# Altium PCB PCB_DYBoard_FlexiFlex.PcbDoc
Units mm, origin at the board's own origin, x right, y up, seen from the top; angles counter-clockwise.
Board outline 29.5 x 12.5 mm, 2 copper layers (Top Layer, Bottom Layer); 34 components, 15 nets, 76 pads, 20 vias.
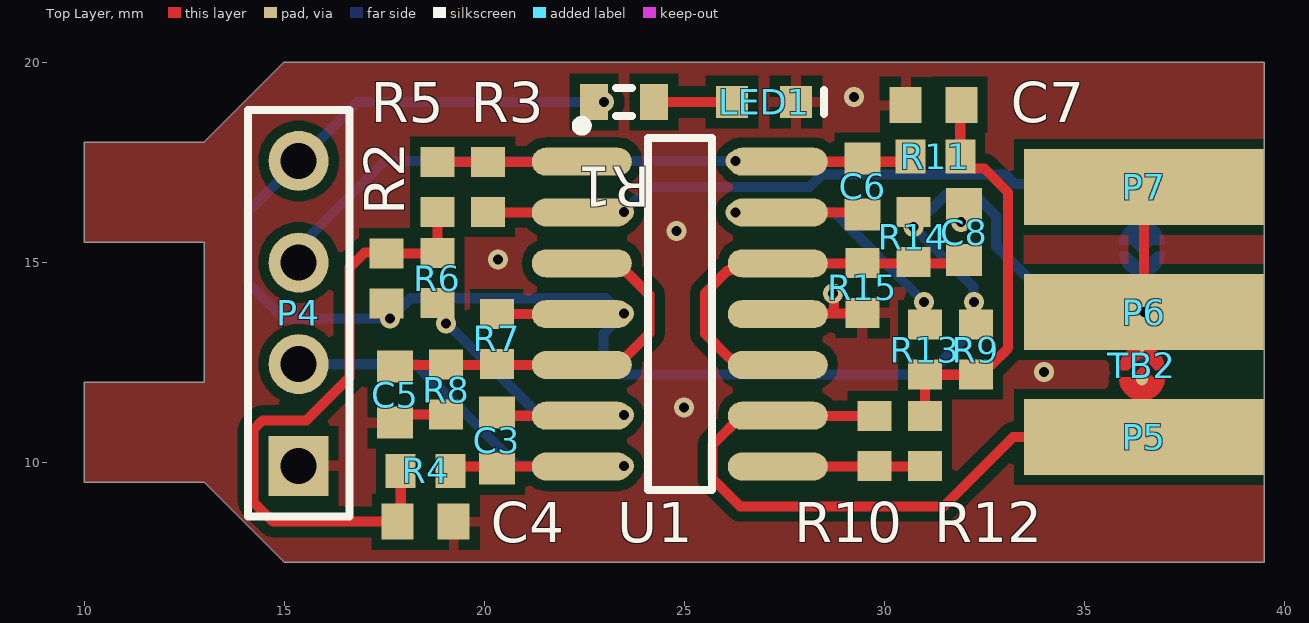
[diagram p0: Top Layer view]
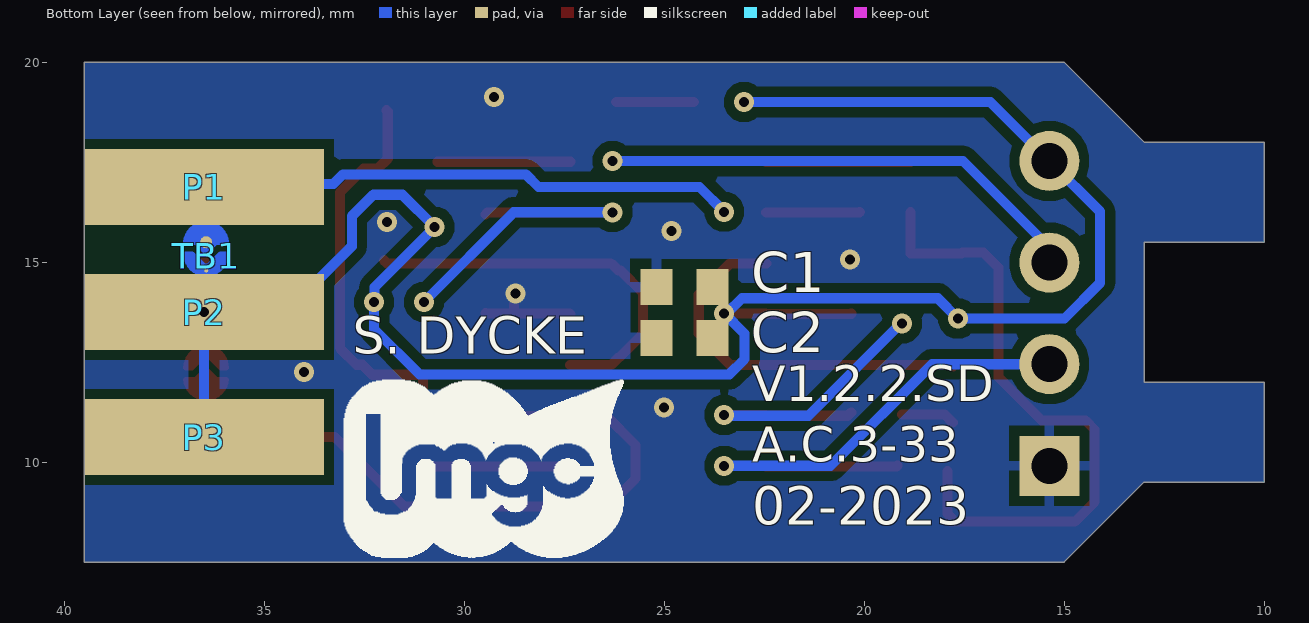
[diagram p1: Bottom Layer view, seen from below]

## Layer stack, top to bottom
Top Solder: solder mask 0.0102, Solder Resist, Dk 3.5
Top Layer: signal copper 0.0356
Dielectric 1: dielectric 0.32, FR-4, Dk 4.8
Bottom Layer: signal copper 0.0356
Bottom Solder: solder mask 0.0102, Solder Resist, Dk 3.5

## Board outline
10,9.5 10,12 13,12 13,15.5 10,15.5 10,18 13,18 15,20 39.5,20 39.5,7.5 15,7.5 13,9.5

## Design rules (kind name [scope] priority, off if disabled: settings)
Clearance [All] p1: gap=0.254 ignorepadtopadclearanceinfootprint=FALSE except(0: Arc-Hole Track-Hole SMDPad-Hole THPad-Hole Via-Hole Fill-Hole Poly-Hole Region-Hole Text-Hole)
ComponentClearance [All] p1: gap=-10 collisioncheckmode=3 verticalgap=2540 showdistances=FALSE
HoleSize [All] p1: absolutevalues=TRUE maxlimit=2.54 minlimit=0.3 maxpercent=80.000 minpercent=20.000
PolygonConnect [All] p1: connectstyle=Relief reliefconductorwidth=0.254 reliefentries=4 polygonreliefangle="90 Angle" airgapwidth=0.254
RoutingVias [All] p1: holewidth=0.711 width=1.27 viastyle="Through Hole" minholewidth=0.711 minwidth=1.27 maxholewidth=0.711 maxwidth=1.27
SolderMaskExpansion [All] p1: expansion=0.102 istentingtop=FALSE
Width [All] p1: maxlimit=0.254 minlimit=0.254 preferedwidth=0.254
28 further rules are at their usual default settings.

## Components (designator, comment, footprint, x,y, rotation, side; value= is the part's Value field where it differs from the comment)
C1 "Cap Semi" 1608[0603] 24.492,14.375 r180 bottom value=0.1µF
C2 "Cap Semi" 1608[0603] 24.492,13.105 r180 bottom value=10µF
C3 "Cap Semi" 1608[0603] 20.32,10.541 r270 top value=0.47µF
C4 "Cap Semi" 1608[0603] 18.542,8.509 r0 top value=10µF
C5 "Cap Semi" 1608[0603] 17.78,11.684 r90 top value=0.47µF
C6 "Cap Semi" 1608[0603] 29.464,16.891 r90 top value=0.47µF
C7 "Cap Semi" 1608[0603] 31.242,18.923 r180 top value=10µF
C8 "Cap Semi" 1608[0603] 32.004,15.748 r270 top value=0.47µF
LED1 "150060BS75000" 0603_A 27,19 r180 top
P1 "solderPad" solderPad#1 36.5,16.875 r0 top
P2 "solderPad" solderPad#1 36.5,13.75 r0 top
P3 "solderPad" solderPad#1 36.5,10.625 r0 top
P4 "Header 4" HDR1X4 15.367,9.906 r90 top
P5 "solderPad" solderPad#2 36.5,10.625 r0 top
P6 "solderPad" solderPad#3 46.994,15.016 r0 top
P7 "solderPad" solderPad#4 36.162,17.152 r0 top
R1 "Res3" J1-0603 23.5,19 r180 top value=1K
R2 "10K" RESC1609X60X30LL10T20 17.565,14.586 r90 top
R3 "470K" RESC1609X60X30LL10T20 20.105,16.872 r270 top
R4 "10K" RESC1609X60X30LL10T20 18.542,9.779 r180 top
R5 "4.7K" RESC1609X60X30LL10T20 18.835,16.872 r90 top
R6 "4.7K" RESC1609X60X30LL10T20 18.835,14.596 r90 top
R7 "100K" RESC1609X60X30LL10T20 20.32,13.081 r270 top
R8 "100K" RESC1609X60X30LL10T20 19.05,11.811 r270 top
R9 "10K" RESC1609X60X30LL10T20 32.297,12.808 r270 top
R10 "470K" RESC1609X60X30LL10T20 29.757,10.522 r90 top
R11 "10K" RESC1609X60X30LL10T20 31.281,17.634 r0 top
R12 "4.7K" RESC1609X60X30LL10T20 31.027,10.522 r270 top
R13 "4.7K" RESC1609X60X30LL10T20 31.027,12.808 r270 top
R14 "100K" RESC1609X60X30LL10T20 30.734,15.621 r270 top
R15 "100K" RESC1609X60X30LL10T20 29.464,14.351 r270 top
TB1 "tin_bridge" tin_bridge#1 36.444,16.092 r0 bottom
TB2 "tin_bridge" tin_bridge#2 36.444,11.467 r0 top
U1 "MCP6004T-E/SL" SOIC-SL14_M 24.894,13.697 r0 top

## Footprints (in the part's own frame and the unit in brackets; to place one, negate y for a bottom-side part, rotate by r counter-clockwise, add the part's x,y. Pads: shape width x height; smd on the part's side, far side on the other; paste and mask are expansions set on the pad)
0603_A [mm] "Chip LED, 2-Leads, Body 1.6x0.8mm, IPC Medium Density"
  rect 0.8x0.8 smd: 1(-0.8,0) 2(0.8,0)
  silkscreen extent -1.5,-0.3 -1.5,0.3, body extent -0.8,-0.4 0.8,0.4, height 0.7
1608[0603] [mm] "Chip Capacitor, Body 1.6x0.8mm, IPC High Density"
  rect 0.8x0.9 smd: 1(-0.7,0) 2(0.7,0)
  body extent -0.87,-0.48 0.87,0.48, height 1.3
HDR1X4 [mm] "Connector; Header; 4 Position"
  rect 1.5x1.5 hole 0.9: 1(0,0)
  round 1.5 hole 0.9: 2(2.54,0) 3(5.08,0) 4(7.62,0)
  silkscreen extent -1.27,-1.27 8.89,1.27
J1-0603 [mm] "Chip Resistor, Body 1.6x0.8mm, IPC High Density"
  rect 0.7x0.9 smd: 1(-0.75,0) 2(0.75,0)
  silkscreen extent -0.2,-0.35 0.2,0.35, body extent -0.85,-0.48 0.85,0.48, height 0.9
RESC1609X60X30LL10T20 [mm] "Chip Resistor, 2-Leads, Body 1.60x0.85mm, IPC High Density"
  rect 0.75x0.85 smd: 1(-0.625,0) 2(0.625,0)
  body extent -0.85,-0.48 0.85,0.48, height 0.6
SOIC-SL14_M [mm] "SOIC, 14-Leads, Body 8.7x3.9mm, Pitch 1.27mm, IPC Low Density"
  oval 2.5x0.7 smd: 1(-2.45,3.81) 2(-2.45,2.54) 3(-2.45,1.27) 4(-2.45,0) 5(-2.45,-1.27) 6(-2.45,-2.54) 7(-2.45,-3.81) 8(2.45,-3.81) 9(2.45,-2.54) 10(2.45,-1.27) 11(2.45,0) 12(2.45,1.27) 13(2.45,2.54) 14(2.45,3.81)
  silkscreen extent -2.57,-4.4 0.8,4.83, body extent -2,-4.38 2,4.38, height 1.75
solderPad#1 [mm]
  rect 6x1.9 smd far side: 20(0,0)
solderPad#2 [mm]
  rect 6x1.9 smd: 20(0,0)
solderPad#3 [mm]
  rect 6x1.9 smd: 20(-10.494,-1.266)
solderPad#4 [mm]
  rect 6x1.9 smd: 20(0.338,-0.277)
tin_bridge#1 [mm]
  round 0.1 smd mask+0: 21(0,1.303)
  round 0.3 smd mask+0: 22(0.005,0.598)
  Top Layer region: -0.509,0.598 -0.503,0.598 -0.249,0.127 0.254,0.127 0.519,0.598 0.259,0.598 0.005,0.852 -0.249,0.598 -0.503,0.598
  Top Layer region: -0.508,0.889 -0.354,0.889 -0.051,1.192 0.056,1.192 0.359,0.889 0.513,0.889 0.508,0.894 0.381,1.143 0.254,1.397 -0.254,1.397 -0.381,1.143
  Top Layer lines w0.127: -0.509,0.598 ccw(c0.005,0.643) 0.519,0.598 ; -0.503,0.598 -0.249,0.598 0.005,0.852 0.259,0.598 0.513,0.598 ; -0.503,0.889 cw(c0.005,0.889) 0,1.397 cw(c0.005,0.889) 0.513,0.889 0.359,0.889 0.056,1.192 0,1.192 -0.051,1.192 -0.354,0.889 -0.503,0.889
tin_bridge#2 [mm]
  round 0.1 smd mask+0: 21(0,1.303)
  round 0.3 smd mask+0: 22(0.005,0.598)
  Top Layer region: -0.509,0.598 -0.503,0.598 -0.249,0.127 0.254,0.127 0.519,0.598 0.259,0.598 0.005,0.852 -0.249,0.598 -0.503,0.598
  Top Layer region: -0.508,0.889 -0.354,0.889 -0.051,1.192 0.056,1.192 0.359,0.889 0.513,0.889 0.508,0.894 0.381,1.143 0.254,1.397 -0.254,1.397 -0.381,1.143
  Top Layer lines w0.127: -0.509,0.598 ccw(c0.005,0.643) 0.519,0.598 ; -0.503,0.598 -0.249,0.598 0.005,0.852 0.259,0.598 0.513,0.598 ; -0.503,0.889 cw(c0.005,0.889) 0.513,0.889 0.359,0.889 0.056,1.192 0,1.192 -0.051,1.192 -0.354,0.889 -0.503,0.889

## Part data
C1 C2 C3 C4 C5 C6 C7 C8: "Capacitor (Semiconductor SIM Model)", LatestRevisionDate=29-May-2009, LatestRevisionNote="IPC-7351 Footprint Added.", PackageDescription="Chip Capacitor", PackageReference=C1206, Published=8-Jun-2000, Publisher="Altium Limited"
LED1: library part CMP-1426-00003-1, "SMD mono-color Chip LED, WL-SMCW, Blue", Color=Blue, Manufacturer="Wuerth Elektronik", ComponentLink1Description="Manufacturer URL", ComponentLink1URL=http://www.we-online.com, ComponentLink2Description=Datasheet, ComponentLink2URL=http://katalog.we-online.com/led/datasheet/150060BS75000.pdf, PackageReference=0603_A, PartNumber=150060BS75000
P4: "Header, 4-Pin", LatestRevisionDate=17-Jul-2002, LatestRevisionNote="Re-released for DXP Platform.", Publisher="Altium Limited"
R1: "Resistor", LatestRevisionDate=29-May-2009, LatestRevisionNote="IPC-7351 Footprint Added.", PackageDescription="Chip Resistor", PackageReference=J1-0603, Published=8-Jun-2000, Publisher="Altium Limited"
R2 R3 R4 R5 R6 R7 R8 R9 R10 R11 R12 R13 R14 R15: library part CMP-2000-03671-1, Manufacturer="Vishay Dale", Part Number=RCWE0603R560FKEA
U1: library part CMP-0187-00028-3, "None", Case/Package=SOIC, Input Bias Current=1pA, Input Offset Voltage (Vos)=4.5mV, Max Operating Temperature=125°C, Max Supply Voltage=6V, Min Operating Temperature=-40°C, Min Supply Voltage=1.8V, Nominal Supply Current=100uA, Operating Supply Voltage=5.5V, Output Current=23mA, Package Quantity=2600, Power Supply Rejection Ratio (PSRR)=86dB, Voltage Gain=112dB, Amplifier Type="GENERAL PURPOSE", Common Mode Rejection Ratio=60dB, Gain Bandwidth Product=1MHz, Input Offset Voltage-Max=4.5mV, Lead Free="Lead Free", Mount="Surface Mount", Number of Channels=4, Number of Circuits=4, Number of Elements=4, Number of Pins=14, Operating Supply Current=100uA, Output Current per Channel=23mA, Packaging="Tape and Reel", Radiation Hardening=No, RoHS Compliant=Yes, Slew Rate=0.6V/µs, Slew Rate-Nom=0.6V/µs, Supply Current=100uA, Technology=CMOS, Unity Gain Bandwidth Product=1MHz

## Via types
v1: diameter 0.5, hole 0.25, Top Layer to Bottom Layer, 20 vias

## Nets (pads, with @x,y where several pads share a name; then routed paths per layer and width w, separated by ;. In a path a pad name is that pad's centre, name@x,y a point inside that pad or via, vN(x,y) a via of type N, cw(c..) or ccw(c..) an arc to the next point about the centre after c; other vN are vias at no path point)
+5: C1.2 C2.2 P2.20 P3.20 P4.4 P6.20 P7.20 R1.2 R2.1 R7.1 R9.1 R14.1 TB1.21 TB2.21 U1.4 | length 54.6
  Top Layer w0.254: R7.1 20.324,13.702 22.44,13.702 U1.4 22.463,13.716 v1(23.495,13.716) ; v1(36.5,13.75) P7.20
  Bottom Layer w0.254: v1(23,19) 16.841,19 P4.4 14.097,16.256 14.097,14.478 14.986,13.589 v1(17.653,13.589) 18.157,14.093 23.051,14.093 23.428,13.716 v1(23.495,13.716) 22.987,13.208 22.987,12.573 23.368,12.192 31.115,12.192 32.25,13.327 v1(32.25,14) 32.237,14.013 32.237,14.372 v1(30.734,15.875) 31.542,16.683 32.267,16.683 32.805,16.145 32.805,15.395 34.45,13.75 v1(36.5,13.75) ; TB1.21 36.444,14.695 36.444,13.806 v1(36.5,13.75) ; P3.20 v1(36.5,13.75)
A0: C3.2 P4.2 R4.1 U1.7 | length 12.5
  Top Layer w0.254: R4.1@19.167,9.906 19.186,9.887 20.32,9.887 U1.7
  Bottom Layer w0.254: P4.2 18.296,12.446 20.836,9.906 v1(23.495,9.906)
A1: C6.2 P4.3 R11.1 U1.14 | length 15.4
  Top Layer w0.254: U1.14 R11.1@30.656,17.507
  Bottom Layer w0.254: P4.3@15.176,15.133 15.176,15.176 17.526,17.526 v1(26.289,17.526)
GND: C1.1 C2.1 C4.2 C5.1 C7.2 C8.1 LED1.1 P4.1 R8.2 R15.2 U1.11 | length 4
  Top Layer w0.254: C5.1 17.982,11.186 R8.2 ; U1.11 27.358,13.712 28.75,13.712 ; v1(28.719,14.212) 28.75,14.181 28.75,13.712 ; R15.2 29.45,13.712 28.75,13.712
  other v1: 24.995,11.367 34,12.25 20.351,15.061 24.808,15.77 31.921,16.002 29.248,19.122
NetC3_1: C3.1 R6.1 U1.6 | length 8.6
  Top Layer w0.254: C3.1 20.404,11.157 U1.6 22.463,11.176 v1(23.495,11.176)
  Bottom Layer w0.254: v1(19.05,13.462) 19.085,13.462 21.389,11.157 23.476,11.157 v1(23.495,11.176)
NetC4_1: C4.1 R2.2 R4.2 R5.1 R6.2 | length 15.9
  Top Layer w0.254: C4.1@17.82,8.614 17.917,8.711 R4.2 ; C4.1 14.725,8.509 14.236,8.998 14.236,10.814 14.459,11.037 15.557,11.037 16.637,12.117 16.637,14.859 17.018,15.24 17.536,15.24 R2.2 17.57,15.216 18.83,15.216 R6.2 R5.1
NetC5_2: C5.2 R7.2 R8.1 U1.3 U1.5 | length 9.7
  Top Layer w0.254: C5.2 17.823,12.427 19.05,12.427 20.32,12.427 U1.5 23.344,12.427 24.13,13.213 24.13,14.181 23.344,14.967 U1.3
NetC6_1: C6.1 R13.1 U1.13 | length 8.8
  Top Layer w0.254: v1(26.289,16.244) 26.296,16.237 29.418,16.237 C6.1
  Bottom Layer w0.254: v1(26.289,16.244) 28.756,16.244 v1(31,14)
NetC7_1: C7.1 R9.2 R11.2 R12.1 R13.2 | length 10.1
  Top Layer w0.254: R12.1 R13.2 R9.2 32.545,12.431 32.686,12.431 33.103,12.848 33.103,16.738 32.505,17.336 32.154,17.336 31.906,17.584 31.906,18.76 C7.1@31.942,18.796
NetC8_2: C8.2 R14.2 R15.1 U1.10 U1.12 | length 10
  Top Layer w0.254: U1.10 26.323,12.427 26.128,12.622 26.113,12.622 25.527,13.208 25.527,14.224 26.094,14.791 26.147,14.791 26.323,14.967 29.464,14.967 30.734,14.967 31.923,14.967 C8.2
NetLED1_2: LED1.2 R1.1 | length 1.9
  Top Layer w0.254: R1.1 LED1.2
NetP1_20: P1.20 R3.2 TB1.22 U1.2 | length 15.9
  Top Layer w0.254: R3.2 20.11,16.242 22.439,16.242 U1.2
  Bottom Layer w0.254: v1(23.495,16.256) 24.114,16.875 28.138,16.875 28.454,17.191 33.027,17.191 33.268,16.95 36.425,16.95 P1.20
NetP5_20: P5.20 R10.2 TB2.22 U1.9 | length 17
  Top Layer w0.254: R10.2 29.752,11.152 27.349,11.152 U1.9 26.444,11.157 25.713,10.426 25.713,9.584 26.407,8.89 31.496,8.89 33.231,10.625 P5.20
NetR3_1: R3.1 R5.2 U1.1 | length 3.6
  Top Layer w0.254: R5.2 18.84,17.502 22.439,17.502 U1.1
NetR10_1: R10.1 R12.2 U1.8 | length 3.7
  Top Layer w0.254: U1.8 27.349,9.892 31.022,9.892 R12.2

## Polygon pours and split planes (outlines as drawn)
no net on Top Solder "NONET_L-01_P-001" (solid, pour order 2): 10,18 13,18 13,9.5 10,9.5
no net on Bottom Solder "NONET_L-01_P-001" (solid, pour order 4): 10,18 13,18 13,9.5 10,9.5
GND on Bottom Layer "NONET_L-01_P-001" (solid, pour order 6): 10,12 10,9.5 13,9.5 15,7.5 39.5,7.5 39.5,20 15,20 13,18 10,18 10,15.5 13,15.5 13,12
GND on Top Layer "NONET_L-01_P-001" (solid, pour order 5): 10,12 10,9.5 13,9.5 15,7.5 39.5,7.5 39.5,20 15,20 13,18 10,18 10,15.5 13,15.5 13,12

## Silkscreen, mask and mechanical layers (free items; w line width, h text height)
Bottom Overlay:
  drawing of 2 lines, arcs and shapes, not listed
  text "S. DYCKE" at 32.776,12.39 h1.58
  text "V1.2.2.SD" at 22.8,11.218 h1.52
  text "A.C.3-33" at 22.8,9.718 h1.51
  text "02-2023" at 22.8,8.12 h1.63
Mechanical 1:
  the board outline again, w0.127
Edge Plating (Mech3):
  lines w0.127: 10,9.5 13,9.5 15,7.5 39.5,7.5 39.5,9.42 ; 10,12 13,12 13,15.5 10,15.5 ; 10,18 13,18 15,20 39.48,20 39.49,19.99 39.49,18.08 ; 39.5,11.83 39.5,12.55 ; 39.5,14.95 39.5,15.67